# EAGLE board Circuit (EAGLE 9.7.0)

Size 217.72 x 129.11 mm. Coordinates in mm from the lower left corner, seen from the top.
Outline: 0,0 217.72,0 217.72,129.11 0,129.11 0,0
Copper layers (1*16): Top 0.035mm / dielectric 1.5mm / Bottom 0.035mm
Design rules "default": minimum track width 6mil, minimum drill 0.35mm, track to track 6mil, track to pad 6mil, pad to pad 6mil, via to via 6mil, smd to smd 6mil, copper to edge 40mil, drill to drill 6mil, minimum pad ring 10mil, minimum via ring 8mil, stop-mask expansion 4mil, vias tented up to drill 0mil, thermal gap 10mil

## Footprints (pad centres in the part's own frame; a part is rotated, then mirrored left to right if it is on the bottom)
LED-RGB-5MM = drill 0.9: B 0.635,0.635; C -0.635,-0.635; G 1.905,-0.635; R -1.905,0.635
KS2E-M-DC5 = drill 0.8: 1 -8.89,-3.81; 4 -1.27,-3.81; 6 3.81,-3.81; 8 8.89,-3.81; 9 8.89,3.81; 11 3.81,3.81; 13 -1.27,3.81; 16 -8.89,3.81
DG01D = drill 1.118 pad 3.15 octagon: + 2.54,0; - -2.54,0
BATTERY-GENERIC = drill 1.118 pad 3.15 octagon: + 2.54,0; - -2.54,0
SEN-13322 = drill 1.016 long: 1 -2.54,0; 2 0,0; 3 2.54,0
ARDUINO-UNO-R3-SHIELD = drill 1.016 pad 1.88: 3.3V 24.13,-2.54; 5V 24.13,0; A0 24.13,12.7; A1 24.13,15.24; A2 24.13,17.78; A3 24.13,20.32; A4 24.13,22.86; A5 24.13,25.4; AREF -24.13,-13.97; D2 -24.13,20.32; D3 -24.13,17.78; D4 -24.13,15.24; D5 -24.13,12.7; D6 -24.13,10.16; D7 -24.13,7.62; D8 -24.13,3.81; D9 -24.13,1.27; D10 -24.13,-1.27; D11 -24.13,-3.81; D12 -24.13,-6.35; D13 -24.13,-8.89; GND@0 24.13,2.54; GND@1 24.13,5.08; GND@2 -24.13,-11.43; IOREF 24.13,-7.62; NC 24.13,-10.16; RES 24.13,-5.08; RX -24.13,25.4; SCL -24.13,-19.05; SDA -24.13,-16.51; TX -24.13,22.86; VIN 24.13,7.62

## Placement (x,y rotation side)
D1  LED-RGBRCBG-PTH  [LED-RGB-5MM]  51.81,106.34 0 top
K1  RELAY-DPDT_KS2E  [KS2E-M-DC5]  116.29,47.83 180 top
M1  MOTOR_DG01D  [DG01D]  148.11,54.82 180 top
PPOWER_SUPPLY  BATTERYGENERIC  [BATTERY-GENERIC]  209.46,25.22 180 top
SEN1  SEN-13322  [SEN-13322]  51.81,7.62 0 top
U1  ARDUINO-UNO-R3-SHIELD  [ARDUINO-UNO-R3-SHIELD]  47.88,57.65 270 top

## Library data of the parts
D1 K1 M1 PPOWER_SUPPLY SEN1 U1 = Tinkercad

## Nets
M1_+: K1.8 M1.+
M1_-: K1.9 M1.-
PPOWER_SUPPLY+: K1.4 PPOWER_SUPPLY.+
PPOWER_SUPPLY-: K1.13 PPOWER_SUPPLY.-
U1_5V: SEN1.1 U1.5V
U1_A3: SEN1.3 U1.A3
U1_D2: D1.G U1.D2
U1_D4: D1.R K1.1 U1.D4
U1_GND: D1.C K1.16 SEN1.2 U1.GND@0 U1.GND@1 U1.GND@2

## Tracks (layer width: path | path; a pad name or v marks a point on that pad's centre or on a via)
M1_+  (1 unrouted)
M1_-  (1 unrouted)
PPOWER_SUPPLY+  (1 unrouted)
PPOWER_SUPPLY-  (1 unrouted)
U1_5V  (1 unrouted)
U1_A3  (1 unrouted)
U1_D2  (1 unrouted)
U1_D4  (2 unrouted)
U1_GND  (5 unrouted)